# EAGLE board Parallel IO Card (EAGLE 4.16)
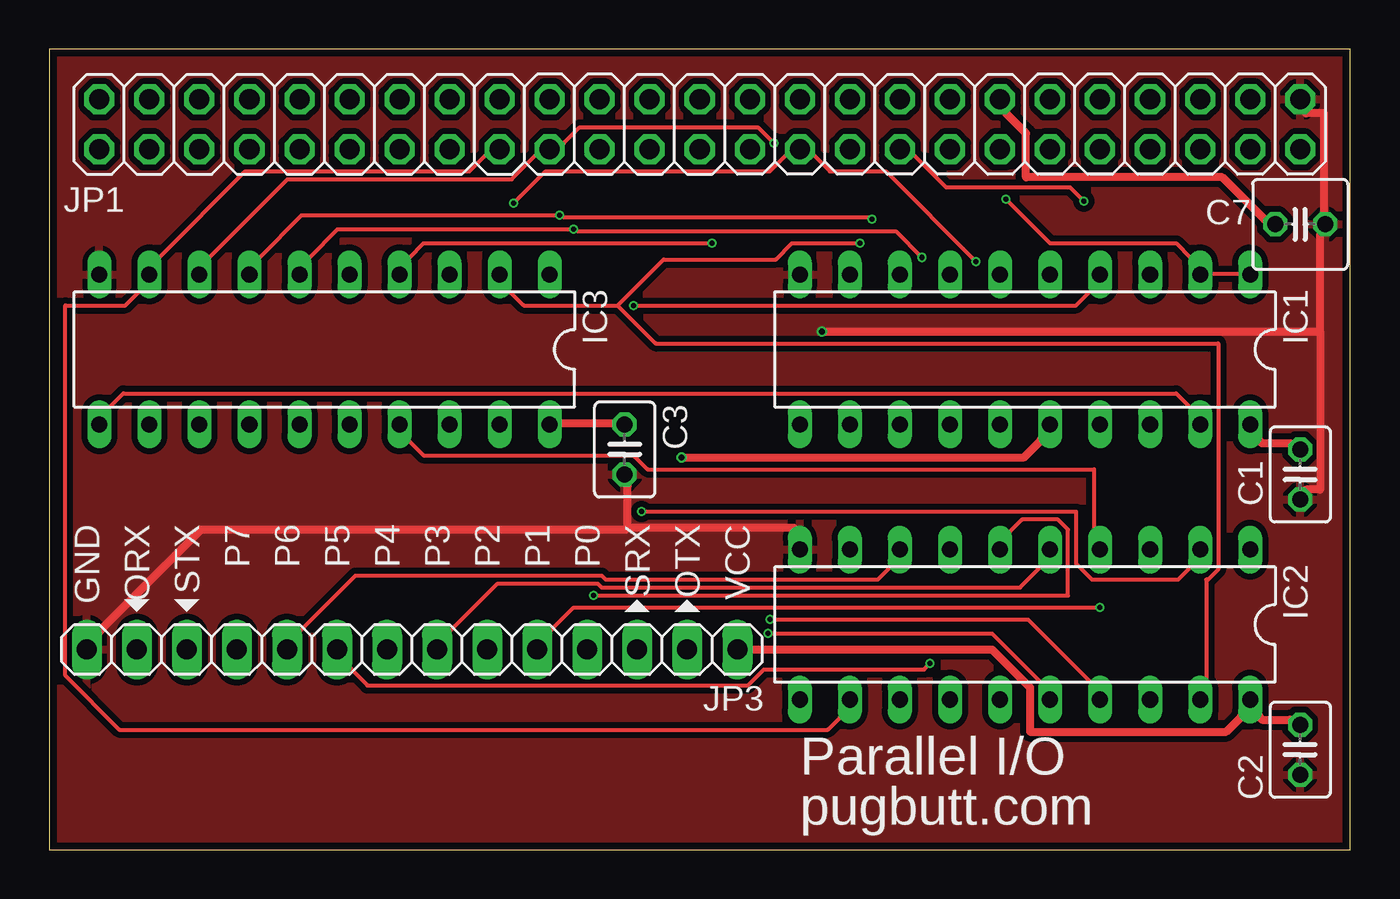
[diagram p0: board, top side]
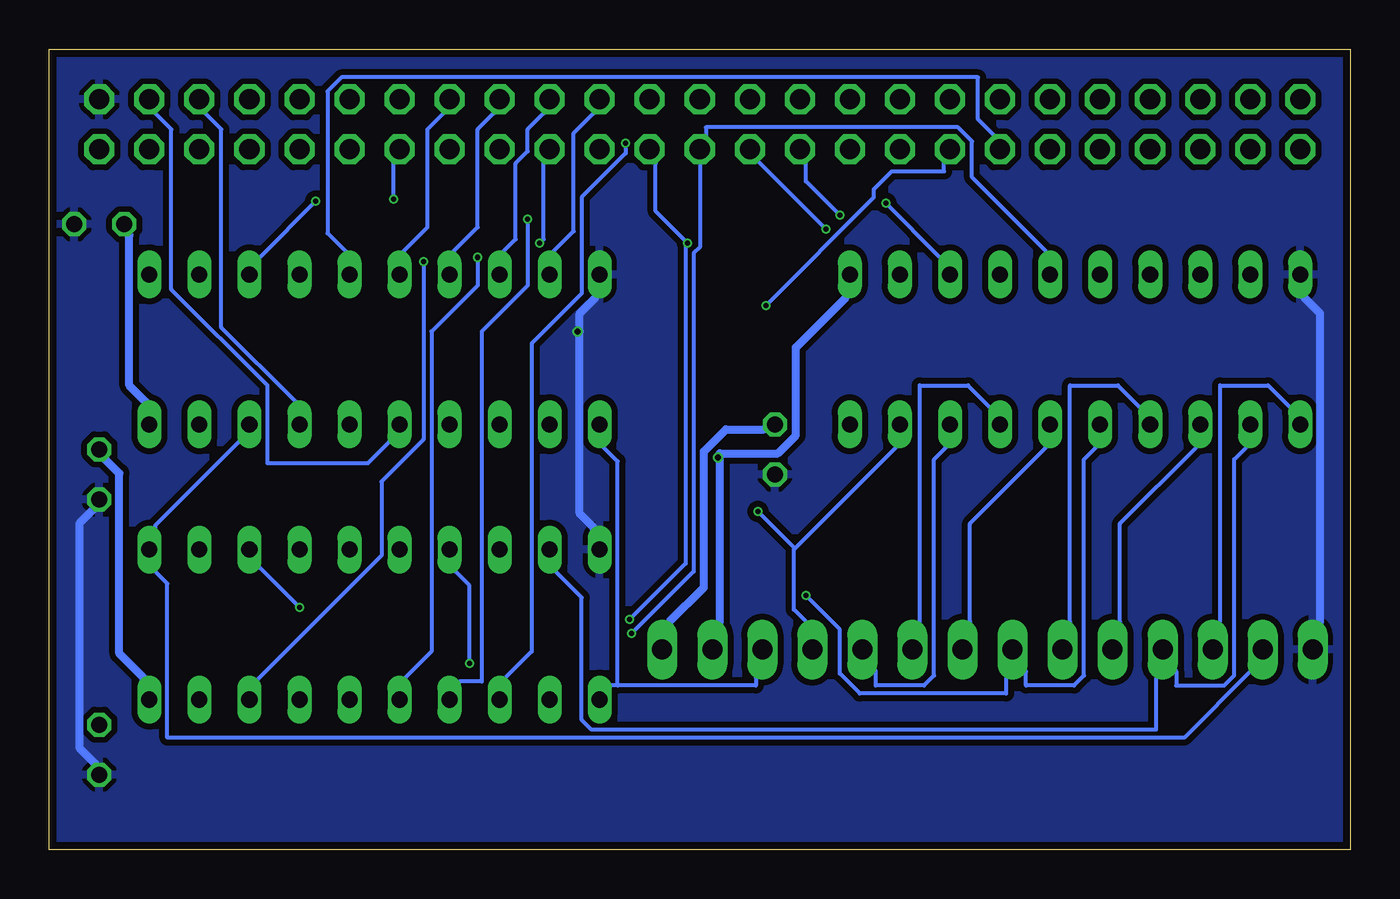
[diagram p1: board, bottom side, seen from below]

Size 66.04 x 40.64 mm. Coordinates in mm from the lower left corner, seen from the top.
Outline: 0,40.64 0,0 66.04,0 66.04,40.64 0,40.64
Copper layers (1*2*15*16): Top 0.0356mm / dielectric 0.1702mm / Route2 0.0178mm / dielectric 1.1938mm / Route15 0.0178mm / dielectric 0.1702mm / Bottom 0.0356mm
Design rules "oshpark-4layer": minimum track width 5mil, minimum drill 10mil, track to track 5mil, track to pad 5mil, pad to pad 5mil, via to via 5mil, smd to smd 5mil, copper to edge 15mil, drill to drill 6mil, minimum pad ring 4mil, minimum via ring 4mil, stop-mask expansion 2.5mil, vias tented up to drill 0mil, thermal gap 10mil
Net classes: 0 default: width 0.203 mm, drill 0.203 mm, clearance 0.254 mm; 1 supply: width 0.406 mm, drill 0.203 mm, clearance 0.305 mm

## Footprints (pad centres in the part's own frame; a part is rotated, then mirrored left to right if it is on the bottom)
C025-030X050 = drill 0.813 octagon: 1 -1.27,0; 2 1.27,0
C025-050X050 = drill 0.813 octagon: 1 -1.27,0; 2 1.27,0
DIL20 = drill 0.813 long: 1 -11.43,-3.81; 2 -8.89,-3.81; 3 -6.35,-3.81; 4 -3.81,-3.81; 5 -1.27,-3.81; 6 1.27,-3.81; 7 3.81,-3.81; 8 6.35,-3.81; 9 8.89,-3.81; 10 11.43,-3.81; 11 11.43,3.81; 12 8.89,3.81; 13 6.35,3.81; 14 3.81,3.81; 15 1.27,3.81; 16 -1.27,3.81; 17 -3.81,3.81; 18 -6.35,3.81; 19 -8.89,3.81; 20 -11.43,3.81
2X25 = drill 1.016 octagon: 1 -30.48,-1.27; 2 -30.48,1.27; 3 -27.94,-1.27; 4 -27.94,1.27; 5 -25.4,-1.27; 6 -25.4,1.27; 7 -22.86,-1.27; 8 -22.86,1.27; 9 -20.32,-1.27; 10 -20.32,1.27; 11 -17.78,-1.27; 12 -17.78,1.27; 13 -15.24,-1.27; 14 -15.24,1.27; 15 -12.7,-1.27; 16 -12.7,1.27; 17 -10.16,-1.27; 18 -10.16,1.27; 19 -7.62,-1.27; 20 -7.62,1.27; 21 -5.08,-1.27; 22 -5.08,1.27; 23 -2.54,-1.27; 24 -2.54,1.27; 25 0,-1.27; 26 0,1.27; 27 2.54,-1.27; 28 2.54,1.27; 29 5.08,-1.27; 30 5.08,1.27; 31 7.62,-1.27; 32 7.62,1.27; 33 10.16,-1.27; 34 10.16,1.27; 35 12.7,-1.27; 36 12.7,1.27; 37 15.24,-1.27; 38 15.24,1.27; 39 17.78,-1.27; 40 17.78,1.27; 41 20.32,-1.27; 42 20.32,1.27; 43 22.86,-1.27; 44 22.86,1.27; 45 25.4,-1.27; 46 25.4,1.27; 47 27.94,-1.27; 48 27.94,1.27; 49 30.48,-1.27; 50 30.48,1.27
1X14 = drill 1.016 long: 1 -16.51,0; 2 -13.97,0; 3 -11.43,0; 4 -8.89,0; 5 -6.35,0; 6 -3.81,0; 7 -1.27,0; 8 1.27,0; 9 3.81,0; 10 6.35,0; 11 8.89,0; 12 11.43,0; 13 13.97,0; 14 16.51,0

## Placement (x,y rotation side)
C1  0.1u  [C025-030X050]  63.5,19.05 270 top
C2  0.1u  [C025-030X050]  63.5,5.08 270 top
C3  0.1u  [C025-030X050]  29.21,20.32 270 top
C7  220U  [C025-050X050]  63.5,31.75 0 top
IC1  PLD_ATF16V8B  [DIL20]  49.53,25.4 180 top
IC2  74AS574N  [DIL20]  49.53,11.43 180 top
IC3  74AS574N  [DIL20]  13.97,25.4 180 top
JP1  [2X25]  33.02,36.83 180 top
JP3  [1X14]  18.41,10.16 180 top

## Library data of the parts
C1-C3 C7 = rcl
IC1 = 07-Retrocomputing
IC2 IC3 = 74xx-us
JP1 JP3 = pinhead

## Nets
/BREQ: JP1.16
/FIRQ: JP1.7
/HALT: JP1.2
/IRQ: IC1.17 JP1.5
/MRDY: JP1.10
/NMI: IC1.15 JP1.3
/RD: JP1.4
/RES: JP1.8
/WR: JP1.6
A0: IC1.6 JP1.15
A1: IC1.7 JP1.17
A2: IC1.8 JP1.19
A3: IC1.9 JP1.21
A4: JP1.23
A5: JP1.25
A6: JP1.27
A7: JP1.29
A8: JP1.31
A9: JP1.33
A10: JP1.35
A11: JP1.37
A12: JP1.39
A13: JP1.41
A14: JP1.43
A15: JP1.45
A16: JP1.47
A17: JP1.49
A18: JP1.50
A19: JP1.48
A20: JP1.46
A21: JP1.44
A22: JP1.42
A23: JP1.40
AUX0: IC1.4 JP1.36
AUX1: IC1.5 JP1.38
BA: JP1.11
BS: JP1.9
D0: IC2.19 IC3.2 JP1.20
D1: IC2.18 IC3.3 JP1.22
D2: IC2.17 IC3.4 JP1.24
D3: IC2.16 IC3.5 JP1.26
D4: IC2.15 IC3.6 JP1.28
D5: IC2.14 IC3.7 JP1.30
D6: IC2.13 IC3.8 JP1.32
D7: IC2.12 IC3.9 JP1.34
ECLK: IC1.1 IC1.2 JP1.14
GND [supply]: C1.2 C2.2 C3.2 C7.2 IC1.10 IC2.10 IC3.10 JP1.1 JP3.14
ORX: IC1.18 IC2.1 JP3.13
OTX [supply]: IC1.16 IC3.1 JP3.2
P0: IC2.2 IC3.19 JP3.4
P1: IC2.3 IC3.18 JP3.5
P2: IC2.4 IC3.17 JP3.6
P3: IC2.5 IC3.16 JP3.7
P4: IC2.6 IC3.15 JP3.8
P5: IC2.7 IC3.14 JP3.9
P6: IC2.8 IC3.13 JP3.10
P7: IC2.9 IC3.12 JP3.11
QCLK: JP1.12
R//W: IC1.3 JP1.18
SRX: IC1.11 IC2.11 JP3.3
STX: IC1.19 IC3.11 JP3.12
VCC [supply]: C1.1 C2.1 C3.1 C7.1 IC1.20 IC2.20 IC3.20 JP1.13 JP3.1

## Tracks (layer width: path | path; a pad name or v marks a point on that pad's centre or on a via)
/IRQ
  Bottom 0.203: IC1.17 53.54,22.76 57.3,26.52 57.3,36.58 58.12,37.39 JP1.5
/NMI
  Bottom 0.203: IC1.15 48.77,20.73 49.89,19.61 54.97,19.61 54.97,23.57 59.84,28.45 59.84,36.58 60.66,37.39 JP1.3
A0
  Bottom 0.203: IC1.6 48.06,30.38 46.84,31.6 46.84,36.58 46.02,37.39 JP1.15
A1
  Bottom 0.203: IC1.7 45.52,30.38 44.3,31.6 44.3,36.58 43.48,37.39 JP1.17
A2
  Bottom 0.203: IC1.8 42.98,30.38 42.37,30.99 42.37,34.85 41.76,35.46 41.76,36.58 40.95,37.39 JP1.19
A3
  Bottom 0.203: IC1.9 40.44,30.38 39.42,31.39 39.42,36.37 38.41,37.39 JP1.21
AUX0  (via drill 0.25)
  Top 0.203: v29.67,27.64 52.12,27.64 52.83,28.35 IC1.4
  Bottom 0.203: v29.67,27.64 24.18,33.12 24.18,33.53 23.27,34.44 20.62,34.44 20.62,34.85 JP1.36
AUX1
  Bottom 0.203: IC1.5 51,30.38 51.92,31.29 51.92,38.51 51.21,39.22 18.9,39.22 18.9,37.08 18.09,36.27 JP1.38
D0  (via drill 0.25)
  Top 0.203: 28.85,27.64 24.08,27.64 23.37,28.35 IC3.2 | 28.85,27.64 31.19,29.97 36.88,29.97 37.69,30.79 v41.15,30.79 | 28.85,27.64 30.79,25.7 59.33,25.7 59.33,14.22 58.83,13.72 58.73,13.72 58.73,8.74 IC2.19
  Bottom 0.203: v41.15,30.79 40.95,30.99 40.95,34.85 JP1.20
D1  (via drill 0.25)
  Top 0.203: v23.57,32.82 25.2,34.44 36.58,34.44 37.39,35.26 JP1.22 38.81,35.26 39.62,34.44 42.47,34.44 v47.04,29.87
  Bottom 0.203: v23.57,32.82 20.83,30.07 IC3.3 | v47.04,29.87 47.04,20.83 49.17,18.69 49.17,14.94 55.47,8.64 IC2.18
D2  (via drill 0.25)
  Top 0.203: v33.63,30.79 19,30.79 18.29,30.07 IC3.4 | v36.58,11.68 49.68,11.68 52.83,8.53 IC2.17
  Bottom 0.203: JP1.24 35.26,34.85 35.26,32.41 v33.63,30.79 33.73,30.58 33.73,14.53 v36.58,11.68
D3  (via drill 0.25)
  Top 0.203: v36.47,10.97 47.85,10.97 50.29,8.53 IC2.16
  Bottom 0.203: IC3.5 15.44,30.38 19.2,34.14 19.2,35.97 19.91,36.68 32.72,36.68 32.72,36.27 JP1.26 33.02,30.58 33.33,30.28 33.33,14.12 v36.47,10.97
D4  (via drill 0.25)
  Top 0.203: IC3.6 13.21,30.07 14.63,31.5 v26.62,31.5 26.82,31.39 42.98,31.39 v44.3,30.07
  Bottom 0.203: v26.62,31.5 30.07,34.95 JP1.28 | v44.3,30.07 44.3,28.65 46.63,26.31 46.63,10.06 47.95,8.74 IC2.15
D5  (via drill 0.25)
  Top 0.203: IC3.7 10.67,30.07 12.8,32.21 v25.91,32.21 26.11,32.11 41.66,32.11 v41.76,32
  Bottom 0.203: v25.91,32.21 27.64,33.93 27.64,34.85 JP1.30 | v41.76,32 41.76,28.65 44.09,26.31 44.09,8.53 45.21,8.53 IC2.14
D6  (via drill 0.25)
  Top 0.203: IC3.8 8.13,30.07 12.09,34.04 23.47,34.04 24.69,35.26 JP1.32 26.11,35.87 26.92,36.68 35.97,36.68 v36.78,35.87
  Bottom 0.203: v36.78,35.87 36.78,35.36 39.01,33.12 39.01,28.25 41.55,25.7 41.55,10.06 42.88,8.74 IC2.13
D7
  Top 0.203: JP1.34 22.15,35.26 21.34,34.44 9.96,34.44 5.59,30.07 IC3.9 4.57,28.35 3.86,27.64 0.81,27.64 0.81,8.84 3.56,6.1 39.52,6.1 40.13,6.71 IC2.12
ECLK  (via drill 0.25)
  Top 0.203: IC1.1 60.45,29.26 58.93,29.26 IC1.2 57.91,30.07 57.2,30.79 50.8,30.79 v48.56,33.02
  Bottom 0.203: v48.56,33.02 48.56,34.85 JP1.14
GND  (via drill 0.3)
  Top 0.406: JP1.1 63.8,37.39 64.72,37.39 64.72,32.31 C7.2 64.52,31.19 64.52,26.31 | 64.52,26.31 64.52,18.29 63.8,18.29 C1.2 | 29.36,16.36 29.36,18.49 C3.2 | 29.36,16.36 37.8,16.36 IC2.10 | JP3.14 2.64,11.18 7.72,16.26 29.26,16.26 29.36,16.36 | v39.22,26.31 64.52,26.31
  Bottom 0.406: C2.2 63.7,4.37 64.52,5.18 64.52,16.56 63.8,17.27 C1.2 | IC3.10 2.34,28.04 1.52,27.23 1.52,11.58 JP3.14 | 39.12,26.31 39.12,17.07 38.41,16.36 IC2.10 | 39.12,26.31 39.12,27.23 38.3,28.04 IC1.10 | 39.12,26.31 v39.22,26.31
  pour Top: 0,40.64 66.04,40.64 66.04,0 0,0
  pour Bottom: 0,40.64 66.04,40.64 66.04,0 0,0
ORX
  Bottom 0.203: IC1.18 56.39,20.73 60.66,16.46 60.66,16.36 IC2.1 60.66,14.12 60.05,13.51 60.05,5.69 8.43,5.69 5.08,9.04 JP3.13
OTX  (via drill 0.3)
  Top 0.406: v32.11,19.91 49.48,19.91 50.29,20.73 IC1.16
  Bottom 0.406: 32,19.91 32,11.58 JP3.2 | 32,19.91 32,20.12 29.06,20.12 28.14,21.03 28.14,25.5 25.6,28.04 IC3.1 | 32,19.91 v32.11,19.91
P0  (via drill 0.25)
  Top 0.203: v30.07,17.17 52.12,17.17 52.12,14.53 52.93,13.72 57.3,13.72 57.91,14.33 IC2.2
  Bottom 0.203: 28.19,15.29 28.25,15.24 28.25,12.19 27.64,11.58 JP3.4 | 28.19,15.29 23.06,20.42 IC3.19 | 28.19,15.29 v30.07,17.17
P1  (via drill 0.25)
  Top 0.203: v53.34,12.29 26.62,12.29 25.5,11.18 JP3.5
  Bottom 0.203: IC3.18 20.52,20.42 21.13,19.81 21.13,8.84 21.64,8.33 24.08,8.33 24.08,9.04 JP3.5 | v53.34,12.29 55.37,14.33 IC2.3
P2
  Top 0.203: IC2.4 53.03,16.36 53.03,19.3 30.38,19.3 29.67,20.02 19,20.02 18.29,20.73 IC3.17
  Bottom 0.203: IC3.17 18.29,22.45 19.41,23.57 21.84,23.57 21.84,11.58 JP3.6
P3
  Top 0.203: IC2.5 50.29,14.33 49.28,13.31 28.04,13.31 27.84,13.51 22.76,13.51 20.42,11.18 JP3.7
  Bottom 0.203: IC3.16 15.44,20.42 19.3,16.56 19.3,11.58 JP3.7
P4  (via drill 0.25)
  Top 0.203: v27.64,12.9 51.71,12.9 51.71,16.26 51.21,16.76 49.38,16.76 48.77,16.15 IC2.6
  Bottom 0.203: IC3.15 12.9,20.42 13.51,19.81 13.51,8.84 14.02,8.33 16.46,8.33 16.46,9.04 JP3.8 17.48,8.74 17.48,7.92 24.89,7.92 25.91,8.94 25.91,11.18 v27.64,12.9
P5  (via drill 0.25)
  Top 0.203: v44.7,9.45 44.4,9.14 36.27,9.14 35.46,8.33 16.15,8.33 15.34,9.14 JP3.9
  Bottom 0.203: IC3.14 10.67,22.45 11.79,23.57 14.22,23.57 14.22,11.58 JP3.9 | v44.7,9.45 44.7,13.41 45.41,14.12 IC2.7
P6
  Top 0.203: IC2.8 42.67,14.33 42.06,13.72 28.25,13.72 28.04,13.92 15.54,13.92 12.8,11.18 JP3.10
  Bottom 0.203: IC3.13 7.82,20.42 11.68,16.56 11.68,11.58 JP3.10
P7
  Bottom 0.203: IC3.12 5.28,20.42 5.89,19.81 5.89,8.84 6.4,8.33 8.84,8.33 8.84,9.04 JP3.11 9.86,8.74 9.86,6.1 38.51,6.1 39.01,6.6 39.01,12.8 40.34,14.12 IC2.9
R//W  (via drill 0.25)
  Top 0.203: v52.53,32.92 51.82,33.63 45.52,33.63 43.89,35.26 JP1.18
  Bottom 0.203: v52.53,32.92 55.37,30.07 IC1.3
SRX
  Bottom 0.203: 37.19,8.33 30.18,8.33 30.18,8.74 JP3.3 | 37.19,8.33 37.59,8.33 IC2.11 | 37.19,8.33 37.19,19.71 37.9,20.42 IC1.11
STX
  Top 0.203: IC1.19 57.91,22.45 57.2,23.16 3.76,23.16 3.05,22.45 IC3.11
  Bottom 0.203: IC3.11 3.05,22.45 4.17,23.57 6.6,23.57 6.6,11.58 JP3.12
VCC
  Top 0.406: IC3.20 25.91,21.64 28.65,21.64 C3.1 | C2.1 62.99,6.6 61.57,6.6 61.47,6.71 IC2.20 60.45,6.71 59.74,5.99 49.78,5.99 49.78,8.23 47.85,10.16 JP3.1 | IC1.20 61.47,20.73 61.57,20.62 62.99,20.62 C1.1 | JP1.13 48.56,37.39 49.58,36.37 49.58,34.14 59.54,34.14 61.67,32 C7.1
  Bottom 0.406: JP3.1 34.54,11.58 32.82,13.31 32.82,20.22 31.7,21.34 29.77,21.34 C3.1 | C7.1 61.98,31.19 61.98,23.57 61.16,22.76 IC1.20 | IC2.20 61.27,8.74 62.48,9.96 62.48,19.1 63.2,19.81 C1.1

## Text on the board
tPlace: Parallel I/O | pugbutt.com
tNames: GND | ORX | STX | P7 | P6 | P5 | P4 | P3 | P2 | P1 | P0 | SRX | OTX | VCC